# Altium PCB Relay_PCB.PcbDoc
Units mm, origin at the board's own origin, x right, y up, seen from the top; angles counter-clockwise.
Board outline 72 x 58 mm, 2 copper layers (Top Layer, Bottom Layer); 51 components, 26 nets, 145 pads, 15 vias.
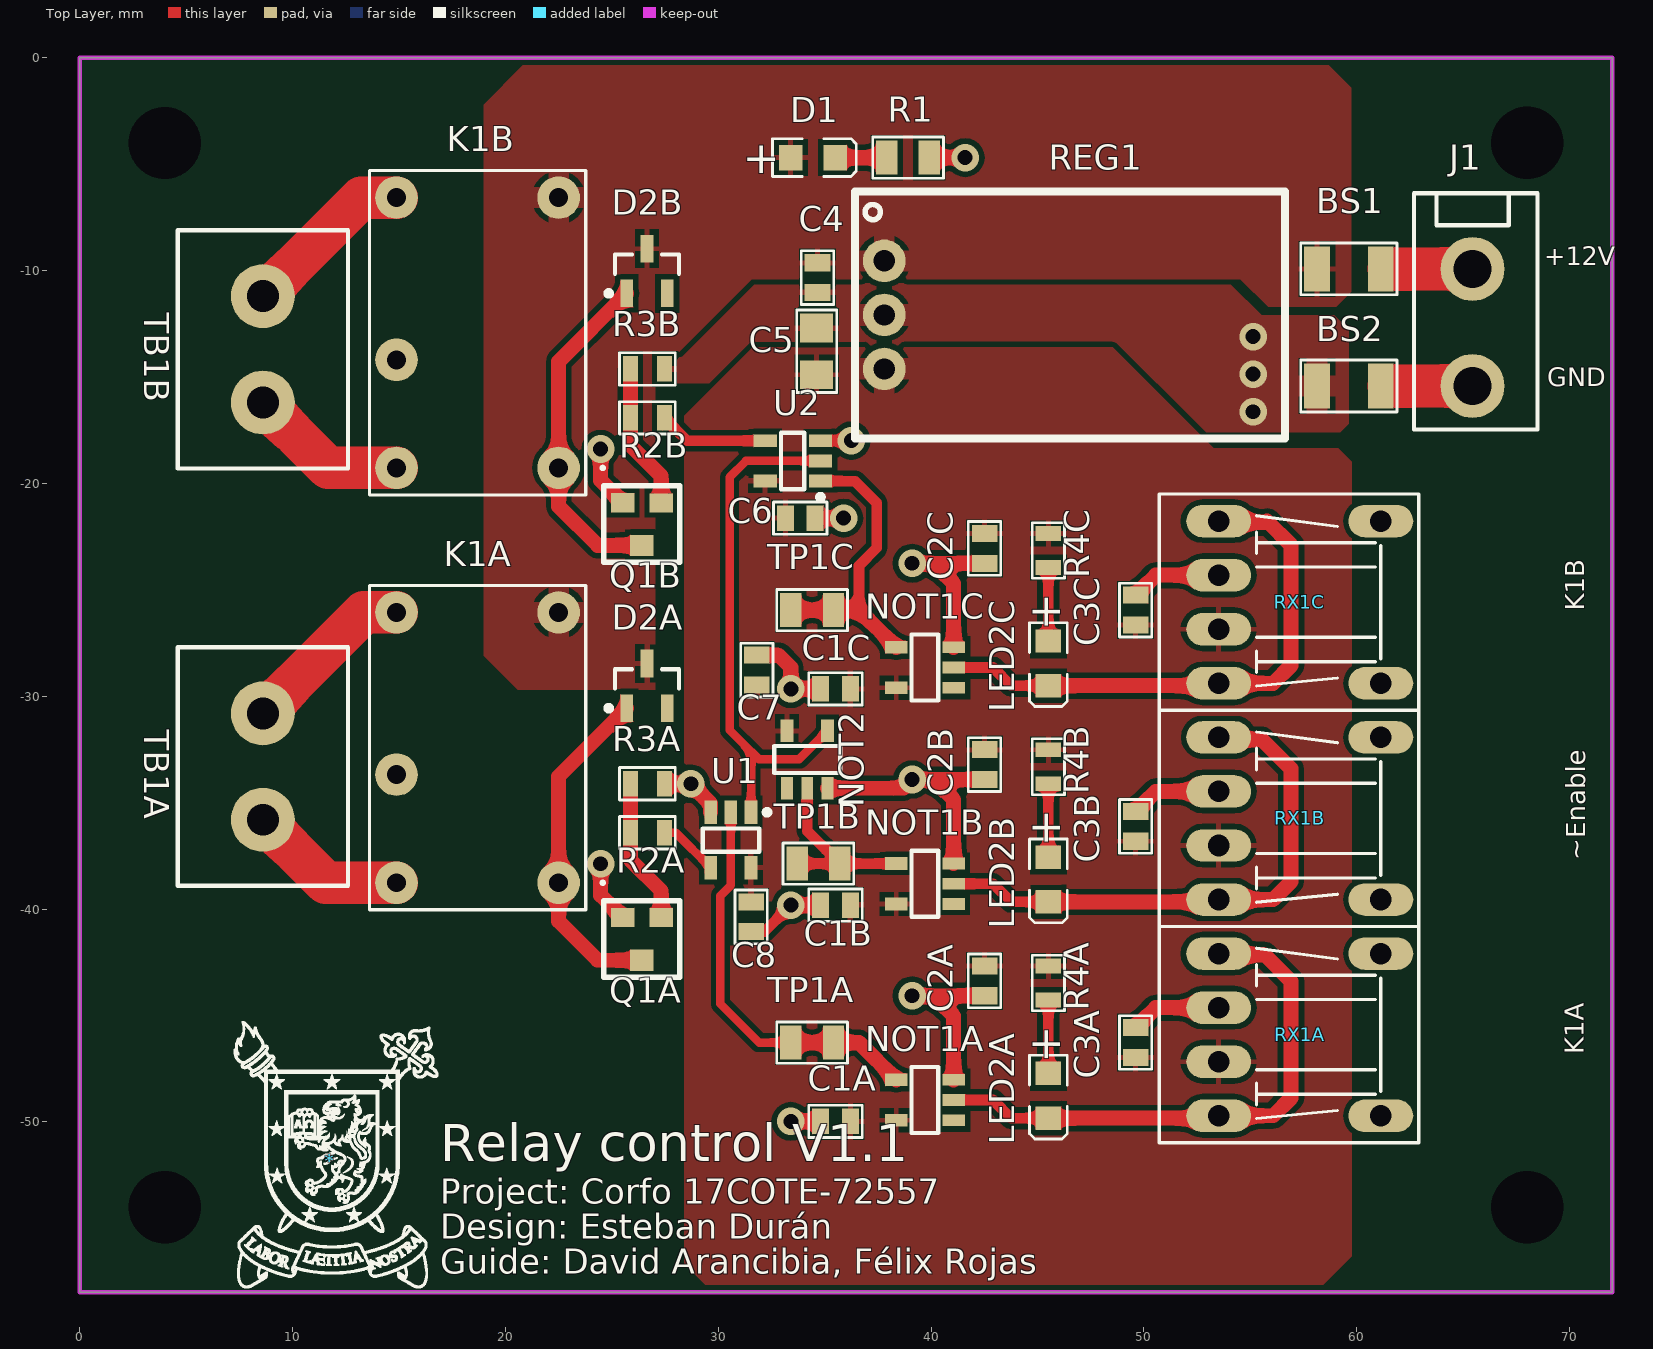
[diagram p0: Top Layer view]
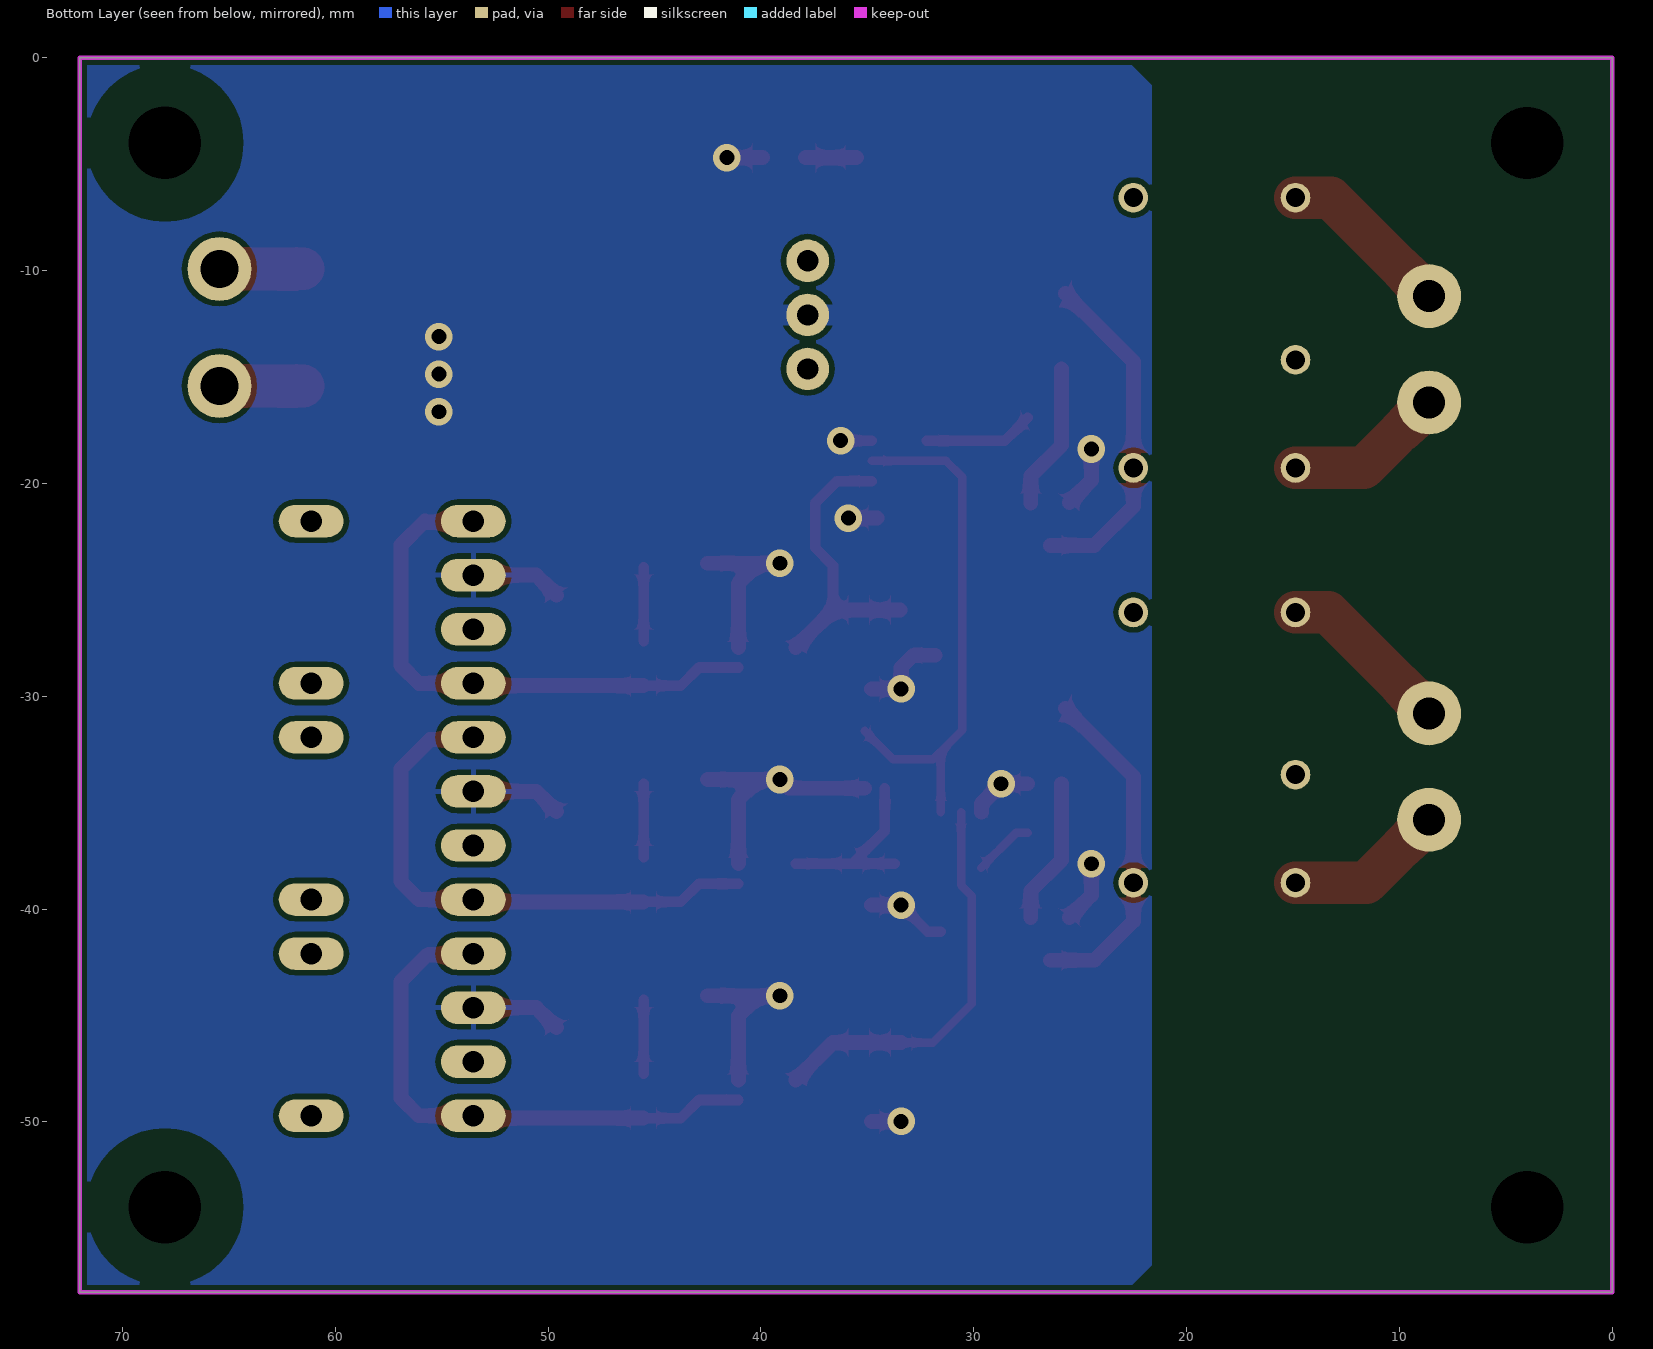
[diagram p1: Bottom Layer view, seen from below]
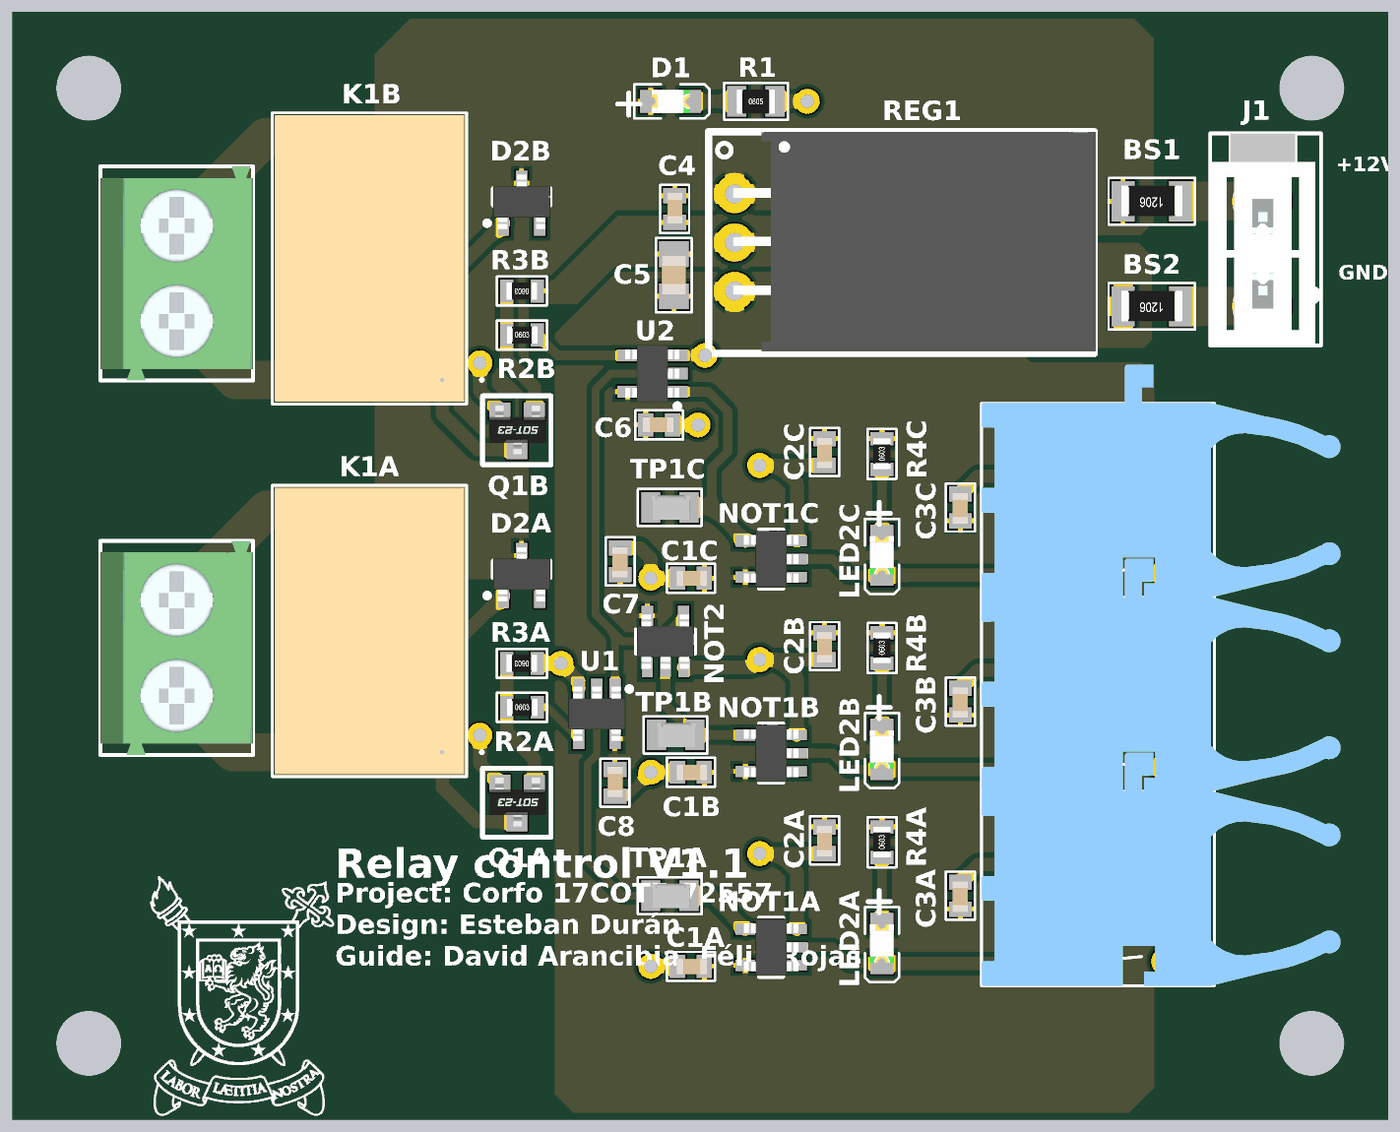
[diagram p2: 3D render of the assembled board from above, using the file's embedded part models]

## Layer stack, top to bottom
Top Solder: solder mask 0.0102, Solder Resist, Dk 3.5
Top Layer: signal copper 0.0356
Dielectric 1: dielectric 0.32, FR-4, Dk 4.8
Bottom Layer: signal copper 0.0356
Bottom Solder: solder mask 0.0102, Solder Resist, Dk 3.5

## Board outline
0,-58 72,-58 72,0 0,0

## Design rules (kind name [scope] priority, off if disabled: settings)
Clearance PernosMecanicos [All vs InNamedUnion('MechanicalPads')] p1: gap=0.254 except(2: THPad-Poly)
Clearance [All] p2: gap=0.254
HoleSize [All] p1: absolutevalues=TRUE maxlimit=4 minlimit=0.025 maxpercent=80.000 minpercent=20.000
PolygonConnect VIA [All vs IsVia] p1: connectstyle=Direct reliefconductorwidth=0.254 reliefentries=4 polygonreliefangle="90 Angle" airgapwidth=0.254
PolygonConnect Excepciones [All vs InComponent('REG1') OR InComponent('BS2') OR InComponent('K1A') OR InComponent('K1B')] p2: connectstyle=Relief reliefconductorwidth=1 reliefentries=4 polygonreliefangle="90 Angle" airgapwidth=0.254
PolygonConnect [All] p3: connectstyle=Relief reliefconductorwidth=0.254 reliefentries=4 polygonreliefangle="90 Angle" airgapwidth=0.254
RoomDefinition FiberOptic3 [InComponentClass('FiberOptic3')] p1: confinementstyle=ConfineIn formatcopy=TRUE lockcomponents=FALSE outline 71.81,-32.29 71.81,-18.19 30.91,-18.19 30.91,-32.29
RoomDefinition TopSheet [InComponentClass('TopSheet')] p2: confinementstyle=ConfineIn formatcopy=TRUE lockcomponents=FALSE outline 73.21,-48.5 83.21,-48.5 83.21,-33.6 73.21,-33.6
RoomDefinition Interface1 [InComponentClass('Interface1')] p3: confinementstyle=ConfineIn formatcopy=TRUE lockcomponents=FALSE outline 4.402,-45.3 28.63,-45.3 28.63,-24.72 4.402,-24.72
RoomDefinition FiberOptic2 [InComponentClass('FiberOptic2')] p4: confinementstyle=ConfineIn formatcopy=TRUE lockcomponents=FALSE outline 71.81,-42.45 71.81,-28.35 30.91,-28.35 30.91,-42.45
RoomDefinition FiberOptic1 [InComponentClass('FiberOptic1')] p5: confinementstyle=ConfineIn formatcopy=TRUE lockcomponents=FALSE outline 71.81,-52.61 71.81,-38.51 30.91,-38.51 30.91,-52.61
RoomDefinition Interface2 [InComponentClass('Interface2')] p6: confinementstyle=ConfineIn formatcopy=TRUE lockcomponents=FALSE outline 4.402,-31.4 28.63,-31.4 28.63,-5.23 4.402,-5.23
RoomDefinition PowerSupply [InComponentClass('PowerSupply')] p7: confinementstyle=ConfineIn formatcopy=TRUE lockcomponents=FALSE outline 30.985,-18.328 71.93,-18.328 71.93,-2.46 30.985,-2.46
RoutingVias [All] p1: holewidth=0.711 width=1.27 viastyle="Through Hole" minholewidth=0.711 minwidth=1.27 maxholewidth=0.711 maxwidth=1.27
SolderMaskExpansion [All] p1: expansion=0.102
Width [All] p1: maxlimit=2 minlimit=0.254 preferedwidth=0.6
29 further rules are at their usual default settings.

## Classes and differential pairs
net class ON_SIGNAL[1..2]: ON_SIGNAL1 ON_SIGNAL2
net class RELAY_SIGNAL[1..3]: RELAY_SIGNAL1 RELAY_SIGNAL2 RELAY_SIGNAL3
component class FiberOptic3: C1C C2C C3C LED2C NOT1C R4C RX1C TP1C
component class TopSheet: * C6 C7 C8 NOT2 U1 U2
component class PowerSupply: BS1 BS2 C4 C5 D1 J1 R1 REG1
component class FiberOptic1: C1A C2A C3A LED2A NOT1A R4A RX1A TP1A
component class FiberOptic2: C1B C2B C3B LED2B NOT1B R4B RX1B TP1B
component class Interface1: D2A K1A Q1A R2A R3A TB1A
component class Interface2: D2B K1B Q1B R2B R3B TB1B
channel class "Fiber optic_inputs": FiberOptic1 FiberOptic2 FiberOptic3
channel class Relay_Interface: Interface1 Interface2

## Components (designator, comment, footprint, x,y, rotation, side; value= is the part's Value field where it differs from the comment)
* "LOGO USACH" "Logo Usach" 11.76,-51.85 r0 top
BS1 "Ferrite bead" RES_1206 61.13,-9.92 r90 top
BS2 "Ferrite bead" RES_1206 61.13,-15.42 r90 top
C1A "100nF" CAP_0603 36.21,-49.97 r270 top (schematic designator C1)
C1B "100nF" CAP_0603 36.21,-39.81 r270 top (schematic designator C1)
C1C "100nF" CAP_0603 36.21,-29.65 r270 top (schematic designator C1)
C2A "100nF" CAP_0603 42.51,-44.07 r180 top (schematic designator C2)
C2B "100nF" CAP_0603 42.51,-33.91 r180 top (schematic designator C2)
C2C "100nF" CAP_0603 42.51,-23.75 r180 top (schematic designator C2)
C3A "100nF" CAP_0603 49.61,-46.97 r180 top (schematic designator C3)
C3B "100nF" CAP_0603 49.61,-36.81 r180 top (schematic designator C3)
C3C "100nF" CAP_0603 49.61,-26.65 r180 top (schematic designator C3)
C4 "10uF" CAP_0603 34.66,-9.63 r0 top
C5 "22uF" CAP_0805 34.62,-14.89 r180 top
C6 "100nF" CAP_0603 33.15,-21.63 r90 top
C7 "100nF" CAP_0603 31.81,-29.47 r180 top
C8 "100nF" CAP_0603 31.54,-39.66 r0 top
D1 "LED" LED_0805_GREEN 34.45,-4.69 r0 top
D2A "Diode GEN PURP" SOT-23 26.66,-29.44 r90 top (schematic designator D2)
D2B "Diode GEN PURP" SOT-23 26.66,-9.95 r90 top (schematic designator D2)
J1 "Conector tipo ATX 2pos_1" "Conector tipo ATX Wurth 2 posiciones - (5.5mm)" 65.44,-12.67 r180 top
K1A "Relay-SPDT" RELAY_SPDT 14.88,-26.06 r180 top (schematic designator K1)
K1B "Relay-SPDT" RELAY_SPDT 14.88,-6.57 r180 top (schematic designator K1)
LED2A "LED" LED_0805_GREEN 45.51,-48.77 r270 top (schematic designator LED2)
LED2B "LED" LED_0805_GREEN 45.51,-38.61 r270 top (schematic designator LED2)
LED2C "LED" LED_0805_GREEN 45.51,-28.45 r270 top (schematic designator LED2)
NOT1A "INV_CMOS" INV_SN74AHC1G14DBVR 39.71,-48.97 r90 top (schematic designator NOT1)
NOT1B "INV_CMOS" INV_SN74AHC1G14DBVR 39.71,-38.81 r90 top (schematic designator NOT1)
NOT1C "INV_CMOS" INV_SN74AHC1G14DBVR 39.71,-28.65 r90 top (schematic designator NOT1)
NOT2 "INV_CMOS" INV_SN74AHC1G14DBVR 34.18,-32.97 r0 top
Q1A "MOSFET N" SOT23_MOD 26.402,-42.4 r180 top (schematic designator Q1)
Q1B "MOSFET N" SOT23_MOD 26.402,-22.91 r180 top (schematic designator Q1)
R1 "5.6K" RES_0805 39.91,-4.69 r270 top
R2A "10" RES_0603 27.469,-36.41 r270 top (schematic designator R2)
R2B "10" RES_0603 27.469,-16.92 r270 top (schematic designator R2)
R3A "10k" RES_0603 25.869,-34.11 r90 top (schematic designator R3)
R3B "10k" RES_0603 25.869,-14.62 r90 top (schematic designator R3)
R4A "680" RES_0603 45.51,-42.67 r0 top (schematic designator R4)
R4B "680" RES_0603 45.51,-32.51 r0 top (schematic designator R4)
R4C "680" RES_0603 45.51,-22.35 r0 top (schematic designator R4)
REG1 "V7805-2000" "REG_SW 5V" 37.8,-12.08 r270 top
RX1A "K1A" HFBR-15X1V 53.51,-42.09 r90 top (schematic designator RX1)
RX1B "~Enable" HFBR-15X1V 53.51,-31.93 r90 top (schematic designator RX1)
RX1C "K1B" HFBR-15X1V 53.51,-21.77 r90 top (schematic designator RX1)
TB1A "Terminal Block 2pos 10A" "Terminal Block 2 pos 8A" 8.602,-33.3 r270 top (schematic designator TB1)
TB1B "Terminal Block 2pos 10A" "Terminal Block 2 pos 8A" 8.602,-13.7 r270 top (schematic designator TB1)
TP1A "Test Point 0805" "Test Point 0805" 34.41,-46.27 r0 top (schematic designator TP1)
TP1B "Test Point 0805" "Test Point 0805" 34.71,-37.86 r0 top (schematic designator TP1)
TP1C "Test Point 0805" "Test Point 0805" 34.41,-25.95 r0 top (schematic designator TP1)
U1 "AND Gate" SOT-23-5 30.59,-36.75 r90 top
U2 "AND Gate" SOT-23-5 33.5,-18.94 r0 top

## Footprints (in the part's own frame and the unit in brackets; to place one, negate y for a bottom-side part, rotate by r counter-clockwise, add the part's x,y. Pads: shape width x height; smd on the part's side, far side on the other; paste and mask are expansions set on the pad)
CAP_0603 [mm] "CAP CER 0603"
  rect 1.2x0.8 smd: 1(0,0) 2(0,-1.4)
  silkscreen extent -0.76,-1.96 0.76,0.56, body extent -0.39,-1.45 0.41,0.15, height 0.4
CAP_0805 [mm] "CAP CER 0805"
  rect 1.55x1.35 smd: 1(0,0) 2(0,-2.2)
  silkscreen extent -0.94,-3.04 0.94,0.84, body extent -0.62,-2.1 0.63,-0.1, height 0.6
"Conector tipo ATX Wurth 2 posiciones - (5.5mm)" [mm] "Vertical Pitch 5.5 mm (64900221122)"
  round 3 hole 1.8: 1(0,2.75) 2(0,-2.75)
  silkscreen extent -3.05,-6.3 2.75,4.8, body extent -3.05,-6.3 2.75,4.8, height 12.9
HFBR-15X1V [mil] "Transmisor fibra Optica Horizontal"
  oval 60x120 hole 40: 1(0,0) 2(-100,0) 3(-200,0) 4(-300,0) 5(-300,-300) 8(0,-300)
  silkscreen extent -350,-370 50,110, body extent -350,-630 130,110, height 300
INV_SN74AHC1G14DBVR [mm] "IC SCHMITT-TRG INV GATE SOT23-5"
  rect 0.55x1.05 smd mask+0.07: 1(-0.95,-1.35) 2(0,-1.35) 3(0.95,-1.35)
  rect 0.6x1.05 smd mask+0.1: 4(0.95,1.35) 5(-0.95,1.35)
  silkscreen extent -1.55,-0.63 1.55,0.63, body extent -1.5,-1.42 1.5,1.42, height 1.2
LED_0805_GREEN [mm] "Chip LED, 2-Leads, Body 2.0x1.3mm, IPC Medium Density"
  rect 1.1x1.2 smd: 1(-1.05,0) 2(1.05,0)
  silkscreen extent -1.91,-0.89 2.03,0.89, body extent -1,-0.63 1,0.62, height 0.68
"Logo Usach" [mm] "9.5 x 12.6 mm"
  silkscreen extent -4.53,-5.94 5.09,6.59
"REG_SW 5V" [mm] "DC/DC Converter P/N: V7805-2000R"
  round 2 hole 1: 1(-2.54,0) 2(0,0) 3(2.54,0)
  silkscreen extent -5.8,-1.37 5.8,18.82, body extent -5.8,-0.1 5.7,18.9, height 9.5
RELAY_SPDT [mm] "P/N: DS1E-M-DC12V"
  round 2 / inner round 1.397 / far side round 1.397 hole 0.889 mask+0: 1(-7.62,12.7) 6(-7.62,0) 7(0,0) 10(0,7.62) 12(0,12.7)
  silkscreen extent -9.77,-1.27 1.27,13.97, body extent -8.76,-1.14 1.14,13.84, height 9.91
RES_0603 [mm] "RES 0603"
  rect 1.2x0.7 smd: 1(0,0) 2(0,-1.6)
  silkscreen extent -0.76,-2.11 0.76,0.51, body extent -0.45,-1.59 0.45,0.01, height 0.5
RES_0805 [mm] "RES 0805"
  rect 1.6x1 smd: 1(0,0) 2(0,-2)
  silkscreen extent -0.97,-2.66 0.97,0.67, body extent -0.61,-2 0.64,0, height 0.5
RES_1206 [mm] "RES 1206"
  rect 2.1x1.2 smd: 1(0,0) 2(0,3)
  silkscreen extent -1.22,-0.76 1.22,3.76, body extent -0.78,-0.1 0.82,3.1, height 0.6
SOT23_MOD [mm]
  rect 1.1x1 smd: D(0,0)
  rect 1.1x0.9 smd: G(-0.918,-2) S(0.889,-2.007)
  silkscreen extent -1.79,-2.8 1.79,0.8, body extent -1.54,-2.3 1.46,0.25, height 1
SOT-23 [mm] "SOT23, 3-Leads, Body 2.9x1.3mm, Pitch 0.95mm, Lead Span 2.5mm, IPC Medium Density"
  rect 1.3x0.6 smd: 1(-1.12,0.96) 2(-1.12,-0.94) 3(0.98,0.01)
  silkscreen extent -1.24,-1.49 0.7,1.93, body extent -1.42,-1.5 1.42,1.5, height 1.2
SOT-23-5 [mm] "SOT353, 5-Leads, Body 2x1.3mm, Pitch 0.65mm, Lead Span 2.1mm, IPC Medium Density"
  rect 1.1x0.6 smd: 1(1.3,-0.95) 2(1.3,0) 3(1.3,0.95) 4(-1.3,0.95) 5(-1.3,-0.95)
  silkscreen extent -0.55,-1.83 1.42,1.32, body extent -1.42,-1.5 1.42,1.5, height 1.2
"Terminal Block 2 pos 8A" [mm] "Wurth Electronics Inc. Pitch=5mm"
  round 3 hole 1.5: 1(-2.5,0) 2(2.5,0)
  silkscreen extent -5.6,-4 5.6,4, body extent -5.6,-4 5.6,4, height 11.35
"Test Point 0805" [mm] "TE Connectivity AMP Connectors P/N: RCT-0C"
  rect 1x1.6 smd: 1(-1,0) 1(1,0)
  silkscreen extent -1.67,-0.97 1.66,0.97, body extent -0.95,-0.64 1.05,0.64, height 1.43

## Part data
BS1 BS2: library part Bead, "4A"
C1A C1B C1C C2A C2B C2C C3A C3B C3C C6 C7 C8: library part Cap, "Capacitor"
C4: library part Cap_0603, "Capacitor Ceramic"
C5: library part Cap_0805, "Capacitor"
D1: library part LED2, "LED Magenta"
D2A D2B: "DIODE GEN PURP 100V 200MA SOT23"
J1: "CONN HEADER VERT 2POS 5.5MM"
K1A K1B: "Relay SPDT 12V Coil"
LED2A LED2B LED2C: library part LED2, "LED Green"
NOT1A NOT1B NOT1C NOT2: library part "INV CMOS"
Q1A Q1B: library part MOSFET_N, "2N7002-FDICT-ND"
R1: library part Res0805
R2A R2B R3A R3B: library part Res0603
R4A R4B R4C: library part Res0603, "Resistor"
REG1: library part V78XX, "DC/DC Converter"
RX1A RX1B RX1C: library part HFBR-2521, "Receptor optico horizontal"
TB1A TB1B: library part "Terminal Block 2 pos 8A pitch 5mm", "Wurth Electronics Inc."
TP1A TP1B TP1C: "Surface Mount Test Points"
U1 U2: "2-Input AND Gate"

## Free pads (board coordinates)
  round 3 hole 3.4 unplated: ""(4,-54) ""(4,-4) ""(68,-54) ""(68,-4)

## Via types
v1: diameter 1.3, hole 0.7, Top Layer to Bottom Layer, 15 vias

## Nets (pads, with @x,y where several pads share a name; then routed paths per layer and width w, separated by ;. In a path a pad name is that pad's centre, name@x,y a point inside that pad or via, vN(x,y) a via of type N, cw(c..) or ccw(c..) an arc to the next point about the centre after c; other vN are vias at no path point)
+5V: C1A.1 C1B.1 C1C.1 C2A.2 C2B.2 C2C.2 C3A.1 C3B.1 C3C.1 C5.1 C6.1 C7.1 C8.1 NOT1A.5 NOT1B.5 NOT1C.5 NOT2.5 R4A.1 R4B.1 R4C.1 REG1.3 RX1A.3 RX1B.3 RX1C.3 U1.5 U2.5
+12V: BS1.1 J1.2 | length 3.9
  Top Layer w2: BS1.1@61.5,-9.92 J1.2
+12V_FILTERED: BS1.2 C4.1 D1.1 D2A.3 D2B.3 K1A.6 K1B.6 REG1.1
GND: BS2.1 J1.1 | length 3.9
  Top Layer w2: BS2.1@61.5,-15.42 J1.1
GND_FILTERED: BS2.2 C1A.2 C1B.2 C1C.2 C2A.1 C2B.1 C2C.1 C3A.2 C3B.2 C3C.2 C4.2 C5.2 C6.2 C7.2 C8.2 NOT1A.3 NOT1B.3 NOT1C.3 NOT2.3 Q1A.S Q1B.S R1.1 R3A.2 R3B.2 REG1.2 RX1A.2 RX1B.2 RX1C.2 U1.3 U2.3 | length 63
  Top Layer w0.5: C8.2 32.16,-41.06 v1(33.41,-39.81) ; U2.3 v1(36.25,-17.99)
  Top Layer w0.7: v1(24.47,-37.87) 24.47,-39.351 Q1A.S ; v1(24.47,-18.38) 24.47,-19.861 Q1B.S ; R3A.2 v1(28.71,-34.11) 29.64,-35.04 U1.3 ; C7.2 32.84,-28.07 33.41,-28.64 v1(33.41,-29.65) C1C.2 ; v1(33.41,-49.97) C1A.2 ; v1(33.41,-39.81) C1B.2 ; C6.2 v1(35.89,-21.63) ; NOT2.3 38.7,-34.32 v1(39.11,-33.91) 40.11,-33.91 ; v1(39.11,-44.07) 40.11,-44.07 ; v1(39.11,-23.75) 40.11,-23.75 ; R1.1 v1(41.6,-4.69) ; NOT1A.3 41.06,-45.02 40.11,-44.07 ; NOT1B.3 41.06,-34.86 40.11,-33.91 ; NOT1C.3 41.06,-24.7 40.11,-23.75 ; C2A.1 40.11,-44.07 ; C2B.1 40.11,-33.91 ; C2C.1 40.11,-23.75 ; C3A.2 50.55,-44.63 RX1A.2 ; C3B.2 50.55,-34.47 RX1B.2 ; C3C.2 50.55,-24.31 RX1C.2
  other v1: 55.13,-16.63 55.13,-14.865 55.13,-13.1
NetD1_2: D1.2 R1.2 | length 2.4
  Top Layer w0.7: D1.2 R1.2
NetD2A_1: D2A.1 K1A.1 Q1A.D | length 16
  Top Layer w0.7: D2A.1 22.5,-33.76 K1A.1 22.5,-40.57 24.33,-42.4 Q1A.D
NetD2B_1: D2B.1 K1B.1 Q1B.D | length 16
  Top Layer w0.7: D2B.1 22.5,-14.27 K1B.1 22.5,-21.08 24.33,-22.91 Q1B.D
NetK1A_7: K1A.7 TB1A.1 | length 8.2
  Top Layer w2: TB1A.1 13.342,-26.06 K1A.7
NetK1A_12: K1A.12 TB1A.2 | length 7.5
  Top Layer w2: TB1A.2 11.562,-38.76 K1A.12
NetK1B_7: K1B.7 TB1B.1 | length 8.2
  Top Layer w2: TB1B.1 13.232,-6.57 K1B.7
NetK1B_12: K1B.12 TB1B.2 | length 7.5
  Top Layer w2: TB1B.2 11.672,-19.27 K1B.12
NetLED2A_1: LED2A.1 R4A.2 | length 3.4
  Top Layer w0.5: LED2A.1 R4A.2
NetLED2A_2: LED2A.2 NOT1A.2 RX1A.1 RX1A.4 | length 26
  Top Layer w0.5: NOT1A.2 42.91,-48.97 43.76,-49.82 LED2A.2
  Top Layer w0.7: LED2A.2 53.4,-49.82 RX1A.4 56.07,-49.71 56.91,-48.87 56.91,-43.39 55.67,-42.15 RX1A.1@53.51,-42.15
NetLED2B_1: LED2B.1 R4B.2 | length 3.4
  Top Layer w0.5: LED2B.1 R4B.2
NetLED2B_2: LED2B.2 NOT1B.2 RX1B.1 RX1B.4 | length 25.9
  Top Layer w0.5: NOT1B.2 42.91,-38.81 43.76,-39.66 LED2B.2
  Top Layer w0.7: LED2B.2 53.4,-39.66 RX1B.4 56.07,-39.55 56.91,-38.71 56.91,-33.4 55.54,-32.03 RX1B.1@53.51,-32.03
NetLED2C_1: LED2C.1 R4C.2 | length 3.4
  Top Layer w0.5: LED2C.1 R4C.2
NetLED2C_2: LED2C.2 NOT1C.2 RX1C.1 RX1C.4 | length 26.1
  Top Layer w0.5: NOT1C.2 42.91,-28.65 43.76,-29.5 LED2C.2
  Top Layer w0.7: LED2C.2 53.4,-29.5 RX1C.4 56.07,-29.39 56.91,-28.55 56.91,-22.89 55.79,-21.77 ; RX1C.1@53.51,-21.83 55.79,-21.83
NetNOT2_4: NOT2.4 U1.1 U2.2 | length 25
  Top Layer w0.4: U1.1 31.54,-32.6 ; U2.2 31.3,-18.94 30.53,-19.71 30.53,-31.59 31.54,-32.6 ; NOT2.4 33.8,-32.95 31.89,-32.95 31.54,-32.6
NetQ1A_G: Q1A.G R2A.2 R3A.1 | length 6.9
  Top Layer w0.7: R3A.1 R2A.2 25.869,-37.689 27.32,-39.14 Q1A.G
NetQ1B_G: Q1B.G R2B.2 R3B.1 | length 6.9
  Top Layer w0.7: R3B.1 R2B.2 25.869,-18.199 27.32,-19.65 Q1B.G
ON_SIGNAL1: R2A.1 U1.4 | length 2.9
  Top Layer w0.4: R2A.1 28,-36.41 U1.4
ON_SIGNAL2: R2B.1 U2.4 | length 5.2
  Top Layer w0.5: R2B.1 28.539,-17.99 U2.4
RELAY_SIGNAL1: NOT1A.4 TP1A.1 U1.2 | length 18.9
  Top Layer w0.4: U1.2 30.59,-38.88 30.1,-39.37 30.1,-44.45 31.92,-46.27 TP1A.1@33.41,-46.27
  Top Layer w0.7: TP1A.1@33.41,-46.27 36.61,-46.27 NOT1A.4
RELAY_SIGNAL2: NOT1B.4 NOT2.2 TP1B.1 | length 8.8
  Top Layer w0.5: TP1B.1@33.71,-37.86 TP1B.1@35.71,-37.86 ; NOT2.2 34.18,-36.33 TP1B.1@35.71,-37.86 ; NOT1B.4 TP1B.1@35.71,-37.86
RELAY_SIGNAL3: NOT1C.4 TP1C.1 U2.1 | length 14.1
  Top Layer w0.5: U2.1 36.42,-19.89 37.446,-20.916 37.446,-23.024 36.61,-23.86 36.61,-25.95
  Top Layer w0.7: TP1C.1@33.46,-25.95 36.61,-25.95 NOT1C.4
pads on no net: D2A.2 D2B.2 K1A.10 K1B.10 NOT1A.1 NOT1B.1 NOT1C.1 NOT2.1 RX1A.5 RX1A.8 RX1B.5 RX1B.8 RX1C.5 RX1C.8

## Polygon pours and split planes (outlines as drawn)
GND_FILTERED on Top Layer "GND_top" (solid, pour order 4): 59.63,-17.2 59.63,-12.8 58.93,-12.1 55.53,-12.1 54.03,-10.6 27.48,-10.6 27.09,-10.99 27.09,-14.6 27.79,-15.3 50.63,-15.3 52.93,-17.6 59.23,-17.6
+12V_FILTERED on Top Layer "+12V_filtered" (solid, pour order 2): 59.73,-11 59.73,-1.4 58.33,0 21.17,0 18.97,-2.2 18.97,-28.1 20.57,-29.7 27.03,-29.7 27.03,-14.95 31.58,-10.4 54.53,-10.4 55.83,-11.7 59.03,-11.7 59.43,-11.3
+5V on Top Layer "+5V" (solid, pour order 0): 37.13,-13.6 48.53,-13.6 53.28,-18.35 59.13,-18.35 59.755,-18.975 59.755,-56.315 58.07,-58 29.75,-58 28.4,-56.65 28.4,-31.68 28.4,-16.83 31.63,-13.6
GND_FILTERED on Bottom Layer "GND" (solid, pour order 6): 72,0 22.93,0 21.63,-1.3 21.63,-56.73 22.9,-58 72,-58

## Keep-outs
Keep-Out Layer:
  the board outline again, w0.2

## Silkscreen, mask and mechanical layers (free items; w line width, h text height)
Top Overlay:
  text "+12V" at 68.81,-10.06 h1.5
  text "GND" at 68.94,-15.73 h1.5
  text "Relay control V1.1" at 16.94,-52.44 h3
  text "Project: Corfo 17COTE-72557" at 16.94,-54.236 h2
  text "Design: Esteban Durán" at 16.94,-55.888 h2
  text "Guide: David Arancibia, Félix Rojas" at 16.94,-57.54 h2

## Dimensions
72,0 to 72,-58 on Mechanical 1
0,0 to 72,0 on Mechanical 1

## Text inside footprints (layer, text, board x,y; h text height)
D1: Top Overlay "+" at 31.15,-5.43 h1.52
LED2A: Top Overlay "+" at 44.77,-45.47 h1.52 r270
LED2B: Top Overlay "+" at 44.77,-35.31 h1.52 r270
LED2C: Top Overlay "+" at 44.77,-25.15 h1.52 r270